# Altium PCB ETRX_FECU.PcbDoc
Units mm, origin at the board's own origin, x right, y up, seen from the top; angles counter-clockwise.
Board outline 150 x 55 mm, 4 copper layers (Top Layer, GND, PWR, Bottom Layer), stack 1.506 mm thick; 58 components, 50 nets, 256 pads, 177 vias.
Unrouted connection lines stored in the file: 6.
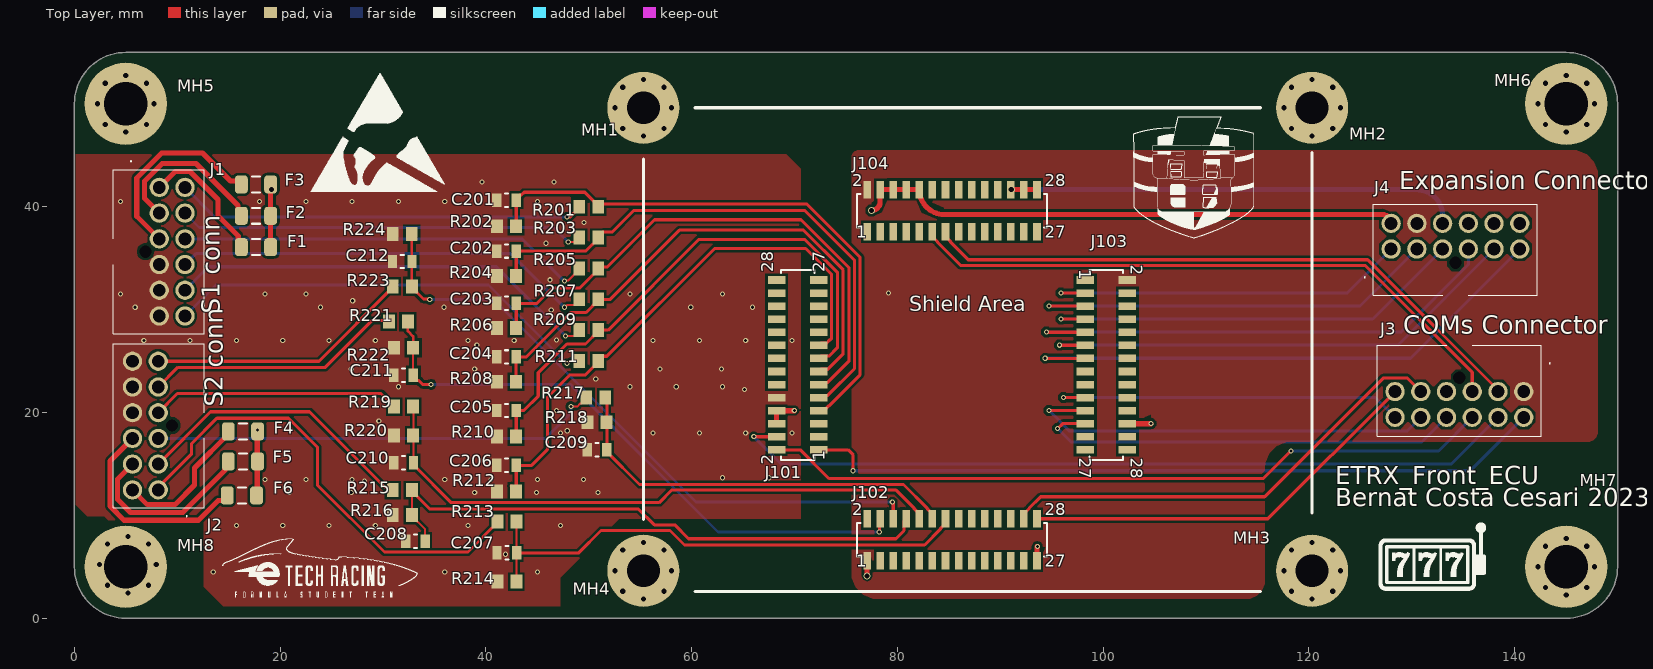
[diagram p0: Top Layer view]
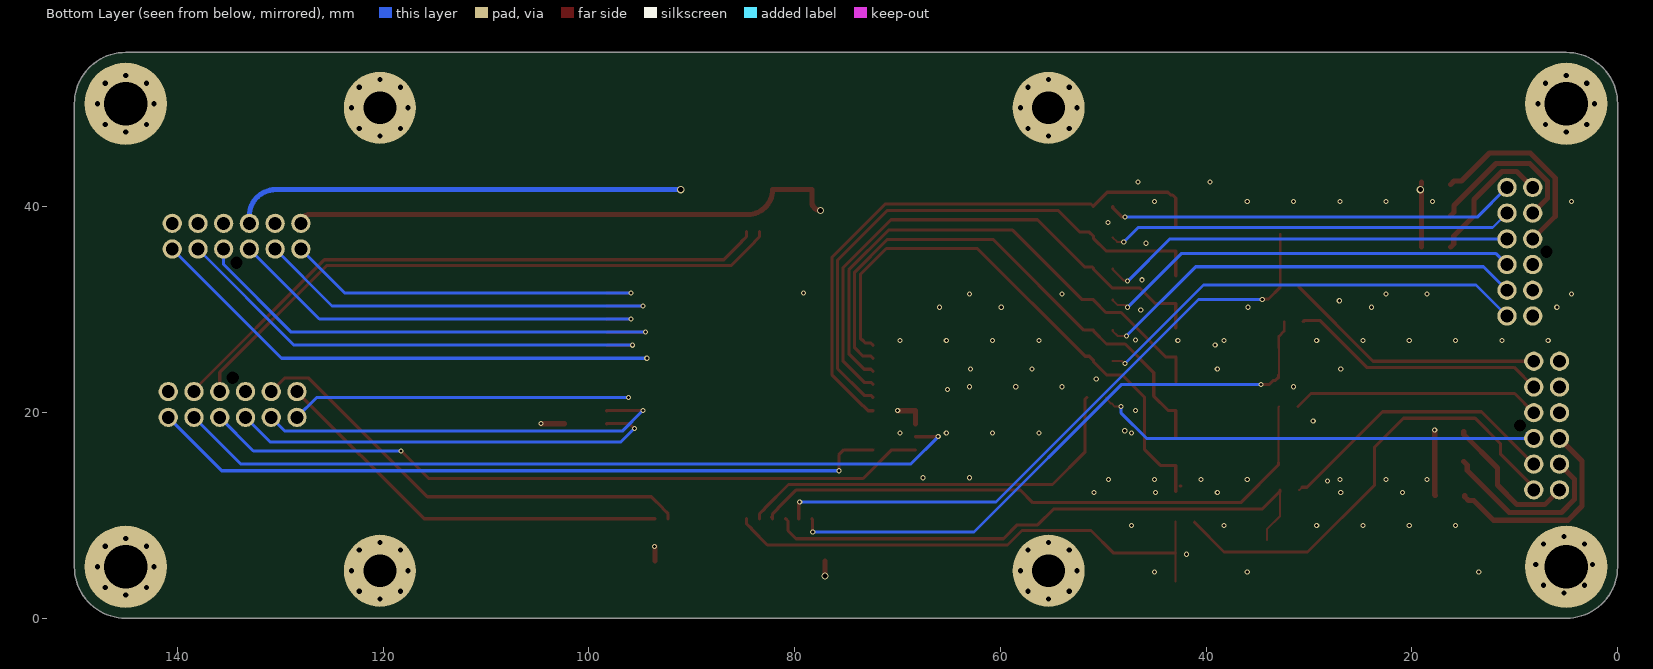
[diagram p1: Bottom Layer view, seen from below]
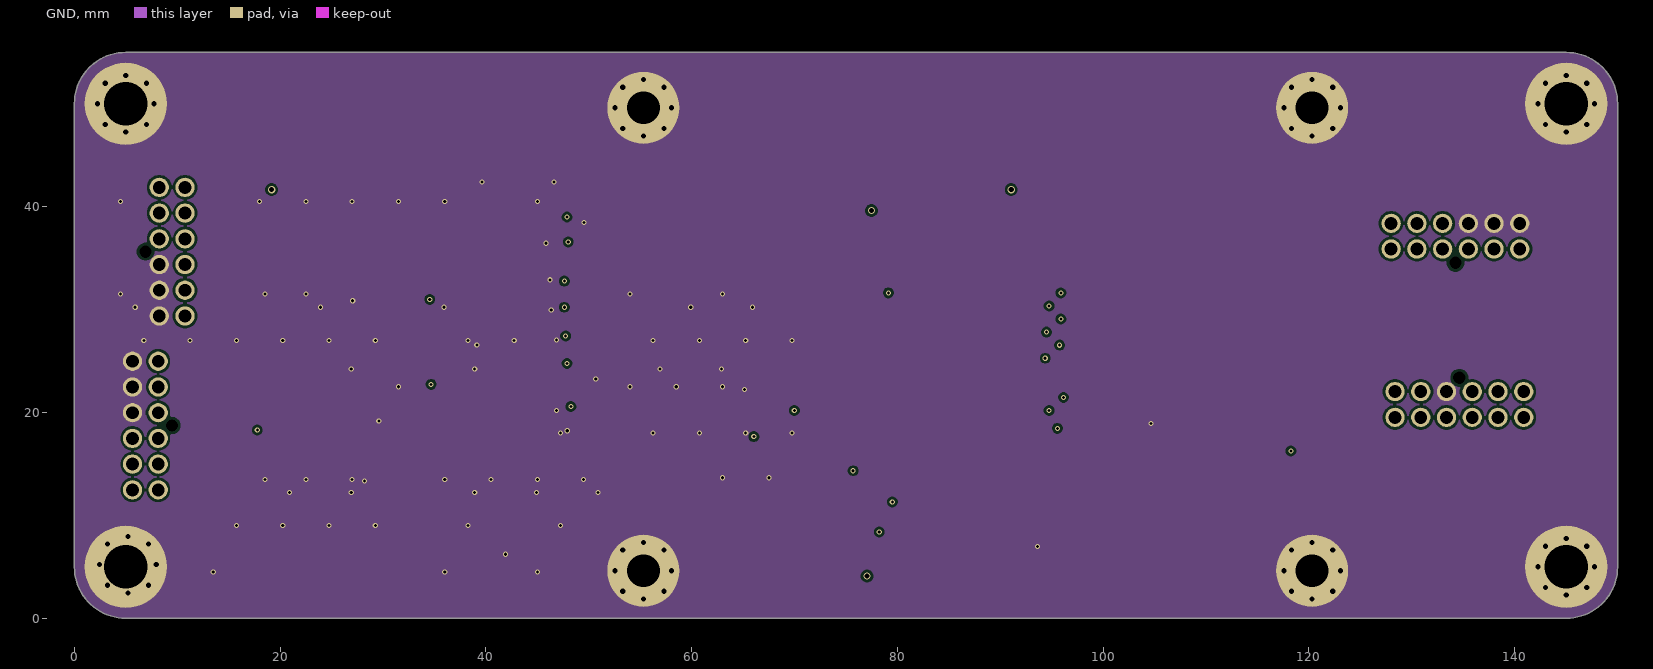
[diagram p2: GND]
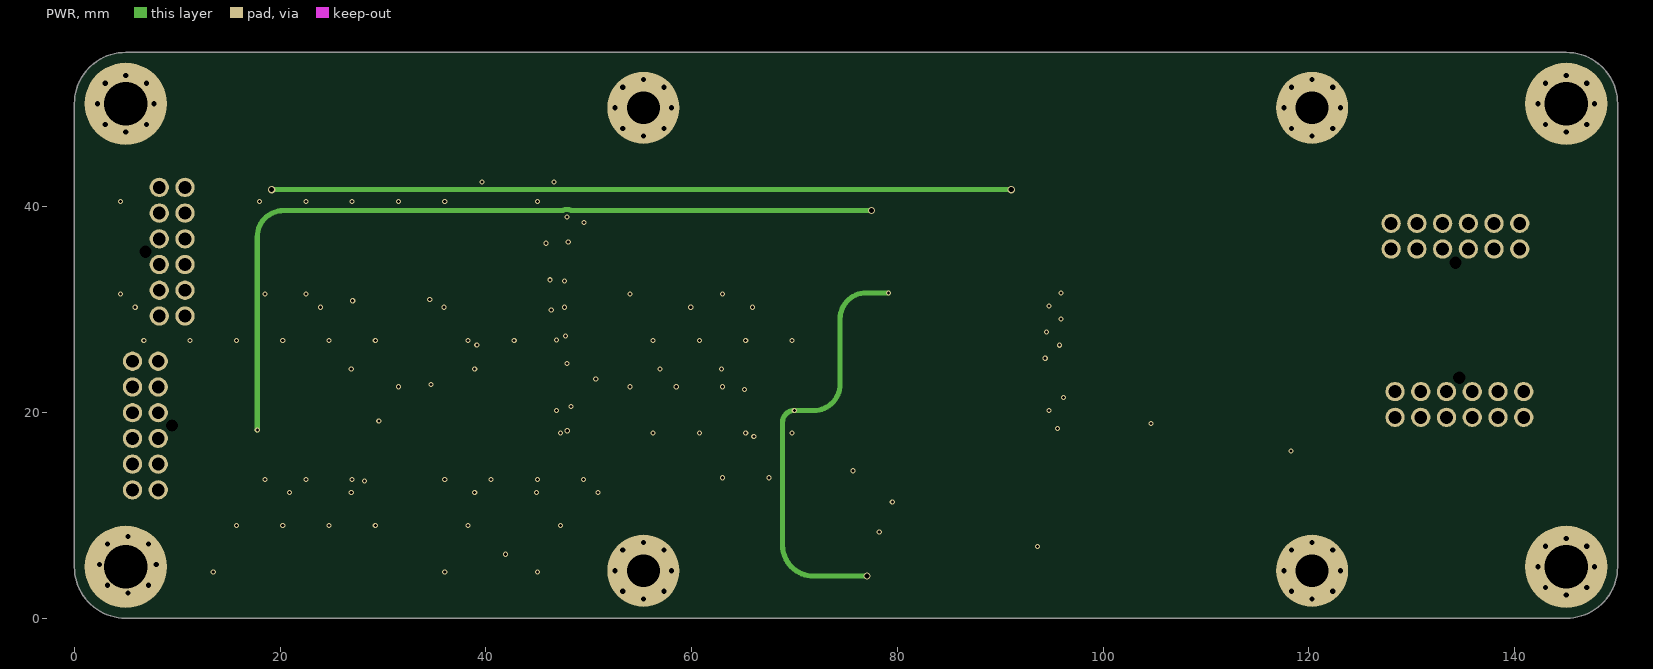
[diagram p3: PWR]
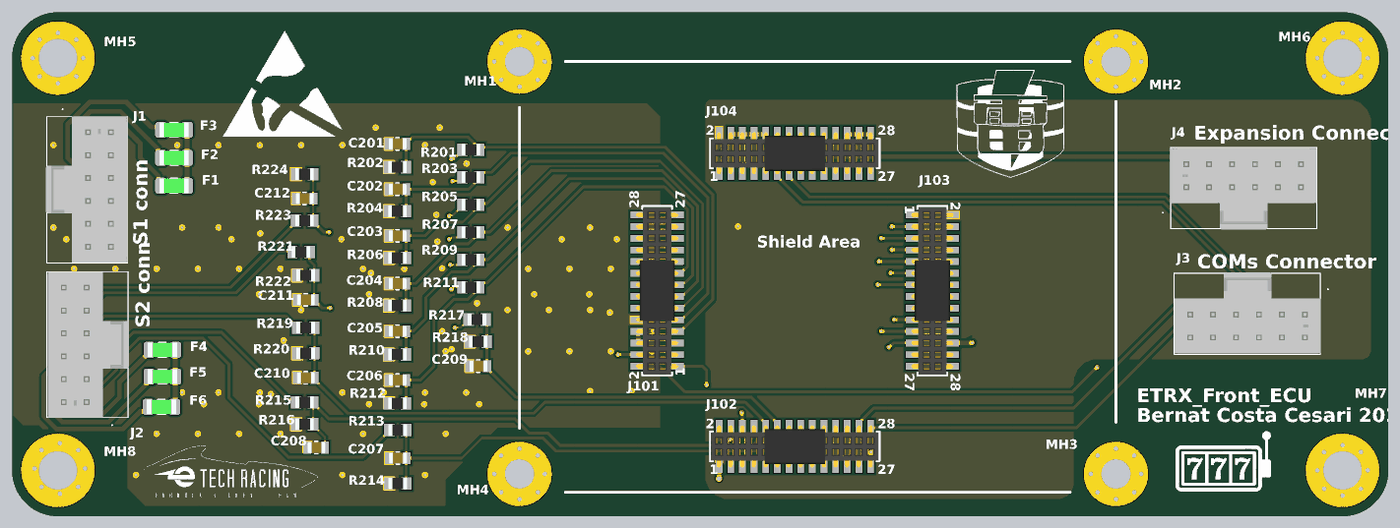
[diagram p4: 3D render of the assembled board from above, using the file's embedded part models]

## Layer stack, top to bottom
Top Solder: solder mask 0.01, Solder Resist, Dk 3.5
Top Layer: signal copper 0.035
Dielectric 2: prepreg 0.1, PP-006, Dk 4.1
GND: signal copper 0.018
Dielectric 4: prepreg 0.1, PP-006, Dk 4.1
Dielectric 1: dielectric 1, FR-4, Dk 4.8
Dielectric 5: prepreg 0.1, PP-006, Dk 4.1
PWR: signal copper 0.018
Dielectric 3: prepreg 0.1, PP-006, Dk 4.1
Bottom Layer: signal copper 0.035
Bottom Solder: solder mask 0.01, Solder Resist, Dk 3.5

## Board outline
0,5 0,50 cw(c5,50) 5,55 145,55 cw(c145,50) 150,50 150,5 cw(c145,5) 145,0 5,0 cw(c5,5)

## Design rules (kind name [scope] priority, off if disabled: settings)
Clearance [All] p1: gap=0.254 ignorepadtopadclearanceinfootprint=FALSE except(0: Arc-Hole Track-Hole SMDPad-Hole THPad-Hole Via-Hole Fill-Hole Poly-Hole Region-Hole Text-Hole)
HoleSize [All] p1: absolutevalues=TRUE maxlimit=2.54 minlimit=0.2 maxpercent=80.000 minpercent=20.000
HoleToHoleClearance [All] p1: gap=0.01 allowstackedmicrovias=TRUE
PlaneClearance [All] p1: clearance=0.5
PlaneConnect [All] p1: planeconnectstyle=Direct reliefexpansion=0.508 reliefentries=4 reliefconductorwidth=0.254 reliefairgap=0.254
PolygonConnect [All] p1: connectstyle=Direct reliefconductorwidth=0.254 reliefentries=4 polygonreliefangle="90 Angle" airgapwidth=0.254
RoutingVias [All] p1: holewidth=0.3 width=0.5 viastyle="Through Hole" minholewidth=0.3 minwidth=0.5 maxholewidth=0.711 maxwidth=1.27
SilkToSilkClearance [All] p1: silktosilkclearance=0
SilkToSolderMaskClearance [IsPad] p1: minsilkscreentomaskgap=0.1 clearancetoexposedcopper=TRUE
SolderMaskExpansion [All] p1: expansion=0.1 istentingtop=FALSE
Width [All] p1: maxlimit=2 minlimit=0.2 preferedwidth=0.254 toplayer_maxwidth=1 bottomlayer_maxwidth=1 minimp=50.000000 maximp=50.000000 favimp=50.000000
24 further rules are at their usual default settings.

## Classes and differential pairs
component class ETRX_FECU: F1 F2 F3 F4 F5 F6 J1 J2 J3 J4 MH1 MH2 MH3 MH4 MH5 MH6 MH7 MH8
component class "[2] Sensors": C201 C202 C203 C204 C205 C206 C207 C208 C209 C210 C211 C212 R201 R202 R203 R204 R205 R206 R207 R208 R209 R210 R211 R212 R213 R214 R215 R216 R217 R218 R219 R220 R221 R222 R223 R224
component class "[1] Shield": J101 J102 J103 J104

## Components (designator, comment, footprint, x,y, rotation, side; value= is the part's Value field where it differs from the comment)
C201 "885012207103" C0805FNPC-R 42,40.64 r180 top
C202 "885012207103" C0805FNPC-R 42,35.687 r180 top
C203 "885012207103" C0805FNPC-R 42,30.607 r180 top
C204 "885012207103" C0805FNPC-R 42,25.4 r180 top
C205 "885012207103" C0805FNPC-R 42,20.193 r180 top
C206 "885012207103" C0805FNPC-R 42,14.859 r180 top
C207 "885012207103" C0805FNPC-R 42.037,6.35 r180 top
C208 "885012207098" C0805FNPC-R 33.147,7.493 r180 top
C209 "885012207098" C0805FNPC-R 50.8,16.383 r180 top
C210 "885012207098" C0805FNPC-R 32.004,15.113 r180 top
C211 "885012207103" C0805FNPC-R 32,23.622 r180 top
C212 "885012207103" C0805FNPC-R 31.873,34.671 r180 top
F1 "0437001.WRA" Fuse_1206 17.653,36.068 r180 top
F2 "0437001.WRA" Fuse_1206 17.653,39.116 r180 top
F3 "0437001.WRA" Fuse_1206 17.653,42.164 r180 top
F4 "0437001.WRA" Fuse_1206 16.383,18.161 r0 top
F5 "0437001.WRA" Fuse_1206 16.383,15.24 r0 top
F6 "0437001.WRA" Fuse_1206 16.284,11.938 r0 top
J1 "1053101112" J_NanoFit_2x6_V 8.255,41.877 r90 top
J2 "1053101112" J_NanoFit_2x6_V 8.15,12.479 r270 top
J3 "1053101112" J_NanoFit_2x6_V 140.87,22.028 r0 top
J4 "1053101112" J_NanoFit_2x6_V 127.989,35.884 r180 top
J101 "62332821021" 62332821021 70.306,24.616 r90 top locked
J102 "62332821021" 62332821021 85.306,7.616 r0 top locked
J103 "62332821021" 62332821021 100.306,24.616 r270 top locked
J104 "62332821021" 62332821021 85.306,39.616 r0 top locked
MH1 "Mounting_Hole_M3" Mounting_Hole_M3 55.306,49.616 r0 top
MH2 "Mounting_Hole_M3" Mounting_Hole_M3 120.306,49.616 r0 top
MH3 "Mounting_Hole_M3" Mounting_Hole_M3 120.306,4.616 r0 top
MH4 "Mounting_Hole_M3" Mounting_Hole_M3 55.306,4.616 r0 top
MH5 "Mounting_Hole_M4" Mounting_Hole_M4#1 5,50 r0 top locked
MH6 "Mounting_Hole_M4" Mounting_Hole_M4#1 145,50 r0 top locked
MH7 "Mounting_Hole_M4" Mounting_Hole_M4#1 145,5 r0 top locked
MH8 "Mounting_Hole_M4" Mounting_Hole_M4#2 5.207,5.207 r0 top
R201 "CR0805-JW-102ELF" R0805FTK 50,40 r180 top
R202 "1k96" R0805FTK 42,38.1 r0 top
R203 "CR0805-JW-102ELF" R0805FTK 50,37 r180 top
R204 "1k96" R0805FTK 42,33.274 r0 top
R205 "CR0805-JW-102ELF" R0805FTK 50,34 r180 top
R206 "1k96" R0805FTK 42,28.194 r0 top
R207 "CR0805-JW-102ELF" R0805FTK 50,31 r180 top
R208 "1k96" R0805FTK 42,22.987 r0 top
R209 "CR0805-JW-102ELF" R0805FTK 50,28 r180 top
R210 "1k96" R0805FTK 42,17.653 r0 top
R211 "CR0805-JW-102ELF" R0805FTK 50,25 r180 top
R212 "1k96" R0805FTK 42,12.319 r0 top
R213 "CR0805-JW-102ELF" R0805FTK 42.037,9.398 r180 top
R214 "1k96" R0805FTK 42.037,3.556 r0 top
R215 "12k5" R0805FTK 31.877,12.446 r0 top
R216 "2k" R0805FTK 31.877,10.033 r180 top
R217 "12k5" R0805FTK 50.673,21.463 r0 top
R218 "2k" R0805FTK 50.8,19.05 r180 top
R219 "12k5" R0805FTK 32,20.574 r0 top
R220 "2k" R0805FTK 32.004,17.78 r180 top
R221 "CR0805-JW-102ELF" R0805FTK 31.496,28.829 r180 top
R222 "1k96" R0805FTK 32,26.289 r0 top
R223 "CR0805-JW-102ELF" R0805FTK 31.877,32.258 r180 top
R224 "1k96" R0805FTK 31.873,37.338 r0 top

## Footprints (in the part's own frame and the unit in brackets; to place one, negate y for a bottom-side part, rotate by r counter-clockwise, add the part's x,y. Pads: shape width x height; smd on the part's side, far side on the other; paste and mask are expansions set on the pad)
62332821021 [mm] "Socket Header, Pitch 1.27 mm, SMT, Vertical, dual row, 28p"
  rect 0.74x1.7 smd: 1(-8.255,-2.05) 2(-8.255,2.05) 3(-6.985,-2.05) 4(-6.985,2.05) 5(-5.715,-2.05) 6(-5.715,2.05) 7(-4.445,-2.05) 8(-4.445,2.05) 9(-3.175,-2.05) 10(-3.175,2.05) 11(-1.905,-2.05) 12(-1.905,2.05) 13(-0.635,-2.05) 14(-0.635,2.05) 15(0.635,-2.05) 16(0.635,2.05) 17(1.905,-2.05) 18(1.905,2.05) 19(3.175,-2.05) 20(3.175,2.05) 21(4.445,-2.05) 22(4.445,2.05) 23(5.715,-2.05) 24(5.715,2.05) 25(6.985,-2.05) 26(6.985,2.05) 27(8.255,-2.05) 28(8.255,2.05)
  silkscreen extent -9.24,-1.62 9.24,1.63, body extent -9.09,-2.3 9.09,2.3, height 4.69
C0805FNPC-R [mm]
  rect 0.9x1.3 smd: 1(-0.95,0) 2(0.95,0)
  silkscreen extent -0.15,-0.65 0.15,0.65, body extent -1.03,-0.63 0.97,0.63, height 0.96
Fuse_1206 [mm] "Chip Resistor, 2-Leads, Body 3,20x1,58mm, IPC Medium Density"
  rrect50% 1.25x1.75 smd: 1(-1.425,0) 2(1.425,0)
  silkscreen extent -0.4,-0.77 0.4,0.77, body extent -1.6,-0.79 1.6,0.79, height 0.86
J_NanoFit_2x6_V [mm]
  round 1.875 hole 1.25: 1(0,0) 2(-2.5,0) 3(-5,0) 4(-7.5,0) 5(-10,0) 6(-12.5,0) 7(0,-2.5) 8(-2.5,-2.5) 9(-5,-2.5) 10(-7.5,-2.5) 11(-10,-2.5) 12(-12.5,-2.5)
  round 0.675 hole 1.2 unplated: MH1(-6.25,1.34)
  silkscreen extent -14.22,-4.35 2.6,4.49, body extent -14.19,-4.26 1.75,4.58, height 10.68
Mounting_Hole_M3 [mm]
  round 7 hole 3.2: 1(0,0)
Mounting_Hole_M4#1 [mm]
  round 8 hole 4.2: 1(0,0)
Mounting_Hole_M4#2 [mm]
  round 8 hole 4.2: 1(-0.207,-0.207)
R0805FTK [mm] "Chip Resistor, 2-Leads, Body 2,00x1,25mm, IPC Medium Density"
  rect 1.15x1.35 smd: 1(-0.925,0) 2(0.925,0)
  body extent -1,-0.63 1,0.63, height 0.65

## Part data
C201 C202 C203 C204 C205 C206 C207 C211 C212: library part C1u-50V-0805FNPC-X7R, "Multilayer Ceramic Capacitor, Wcap-Csgp Series, 1 F, 10%, X7R, 50 V, 0805 [2012 Metric] Rohs Compliant: Yes", Capacitance=1uF, Case Code (Imperial)=0805, Case Code (Metric)=2012, Dielectric=X7R, Manufacturer 1="Wurth Electronics", Max Operating Temperature=85°C, Min Operating Temperature=-55°C, Supplier Part Number 1=1813523, Tolerance=10%, Voltage Rating=50V, .Creator=GP, Case/Package=0805, Category="Ceramic Capacitors", ComponentLink1Description=http://www.farnell.com/datasheets/1958501.pdf?src-supplier=Farnell, ComponentLink1URL=http://www.farnell.com/datasheets/1958501.pdf?src-supplier=Farnell, ComponentLink2Description=http://www.farnell.com/datasheets/1958501.pdf?src-supplier=Element14, ComponentLink2URL=http://www.farnell.com/datasheets/1958501.pdf?src-supplier=Element14, ComponentLink3Description=https://katalog.we-online.de/pbs/datasheet/885012107003.pdf?src-supplier=Digi-Key, ComponentLink3URL=https://katalog.we-online.de/pbs/datasheet/885012107003.pdf?src-supplier=Digi-Key, ComponentLink4Description=http://www.farnell.com/datasheets/1958501.pdf?src-supplier=Newark, ComponentLink4URL=http://www.farnell.com/datasheets/1958501.pdf?src-supplier=Newark, Length=0.079inch, Manufacturer Part Number 1=885012207103, Mount="Surface Mount", Packaging="Cut Tape", Pricing 1="50=0,27200, 250=0,25300, 500=0,22800, 1250=0,20100, 2500=0,17100 (GBP)", REACH SVHC=Unknown, RoHS=Yes, RoHS Compliant=Yes, Stock 1=5100, Supplier 1=RSComponents, Thickness=0.053inch, Voltage Rating (DC)=50V, Width=0.049inch
C208 C209 C210: library part C100n-50V-0805FNPC-X7R, "Cap, 0.1ΜF, 50V, 10%, X7R, 0805", Capacitance=100nF, Case Code (Imperial)=0805, Case Code (Metric)=2012, Dielectric=X7R, Manufacturer 1="Wurth Electronics", Max Operating Temperature=125°C, Min Operating Temperature=-55°C, Supplier Part Number 1=1813493, Tolerance=10%, Voltage Rating=50V, .Creator=DR, Case/Package=0805, Category="Ceramic Capacitors", ComponentLink1Description=http://www.farnell.com/datasheets/1958498.pdf?src-supplier=Farnell, ComponentLink1URL=http://www.farnell.com/datasheets/1958498.pdf?src-supplier=Farnell, ComponentLink2Description=http://www.farnell.com/datasheets/1958498.pdf?src-supplier=Element14, ComponentLink2URL=http://www.farnell.com/datasheets/1958498.pdf?src-supplier=Element14, ComponentLink3Description=https://katalog.we-online.de/pbs/datasheet/885012207098.pdf?src-supplier=Digi-Key, ComponentLink3URL=https://katalog.we-online.de/pbs/datasheet/885012207098.pdf?src-supplier=Digi-Key, ComponentLink4Description=http://www.farnell.com/datasheets/1958498.pdf?src-supplier=Newark, ComponentLink4URL=http://www.farnell.com/datasheets/1958498.pdf?src-supplier=Newark, Length=0.079inch, Manufacturer Part Number 1=885012207098, Mount="Surface Mount", Packaging="Cut Tape", Pricing 1="100=0,10200, 500=0,07100, 2000=0,06100 (GBP)", REACH SVHC=Unknown, RoHS=Yes, RoHS Compliant=Yes, Stock 1=8000, Supplier 1=RSComponents, Thickness=0.035inch, Voltage Rating (DC)=50V, Width=0.049inch
F1 F2 F3 F4 F5 F6: library part Fuse_1A_63V_1206, "Fuse Chip Fast Acting 1A 63V SMD Solder Pad 1206 Ceramic T/R Automotive", Case Code (Imperial)=1206, Case Code (Metric)=3216, Current Rating=1A, Manufacturer=Littelfuse, Max Operating Temperature=150°C, Min Operating Temperature=-55°C, Supplier Part Number 1=F10001CT-ND, Voltage Rating (AC)=63V, .Creator=DO, Approvals=CSA,cURus, Case/Package=1206, Category=Fuses, ComponentLink1Description=https://www.littelfuse.com/~/media/electronics/datasheets/fuses/littelfuse_fuse_437a_datasheet.pdf.pdf?src-supplier=Digi-Key, ComponentLink1URL=https://www.littelfuse.com/~/media/electronics/datasheets/fuses/littelfuse_fuse_437a_datasheet.pdf.pdf?src-supplier=Digi-Key, ComponentLink2Description="Where buy it", ComponentLink2URL=https://www.mouser.es/ProductDetail/Littelfuse/0437001WRA?qs=DXv0QSHKF4z9CJhPXjxR%252BA%3D%3D, Fuse Type="Board Mount (Cartridge Style Excluded)", Manufacturer Part Number=0437001.WRA, Mount="Surface Mount", Packaging="Tape and Reel", Pricing 1="1=1,52000, 5=1,47000, 10=1,37600, 50=1,13860, 100=0,94880, 250=0,92508, 500=0,78276, 1000=0,68788 (USD)", RoHS=Yes, Stock 1=5820, Supplier 1=Digi-Key, Voltage Rating (DC)=63V
J1 J2 J3 J4: library part J_NanoFit_2x6_V, "Nano-Fit Vertical Header, Through Hole, 2.50mm Pitch, Dual Row, 12 Circuits, with Kinked Pins, Tin (Sn) Plating, Black, Glow-Wire Capable, Tray"
J101 J102 J103 J104: "WR-PHD Socket Header, SMT, Vertical, pitch 1.27mm, 2 Row, 28P", Contact Resistance=20mΩ, Manufacturer="Wurth Elektronik", Operating Temperature Max=105°C, Operating Temperature Min=-40°C, Rated Current=1A, Withstanding Voltage=500V, Working Voltage=250V, Category="Board-to-Board Connectors", ComponentLink1Description="Website Link", ComponentLink1URL=https://www.we-online.com/redexpert/article/62332821021?ad, ComponentLink2Description="Datasheet Link", ComponentLink2URL=https://www.we-online.com/redexpert/spec/62332821021?ad, Gender="Socket Header", Manufacturer Part Number=62332821021, Match Code=WR-PHD, Mount="Surface Mount", Number of Pins=28, Number of Rows=2, Orientation=Vertical, Packaging="Tape and Reel", Pitch=1.27mm
R201 R203 R205 R207 R209 R211 R213 R221 R223: library part R1k-0805FTK, "Res Thick Film 0805 1K Ohm 5% 1/8W ±200ppm/°C Molded SMD SMD Paper Tape on Plastic Reel", Case Code (Imperial)=0805, Case Code (Metric)=2012, Manufacturer 1=Bourns, Max Operating Temperature=155°C, Max Power Dissipation=125mW, Min Operating Temperature=-55°C, Package Quantity=1, Resistance=1kR, Resistor Type="Thick Film", Temperature Coefficient=200ppm/°C, Tolerance=5%, Voltage Rating=150V, .Creator=GP, Case/Package=0805, Category="Chip SMD Resistors", ComponentLink1Description=https://datasheet.ciiva.com/11821/0900766b80fcdb72-11821134.pdf?src-supplier=RSComponents, ComponentLink1URL=https://datasheet.ciiva.com/11821/0900766b80fcdb72-11821134.pdf?src-supplier=RSComponents, ComponentLink2Description=https://datasheet.ciiva.com/15225/getdatasheetpartid-78155-15225381.pdf?src-supplier=Verical, ComponentLink2URL=https://datasheet.ciiva.com/15225/getdatasheetpartid-78155-15225381.pdf?src-supplier=Verical, ComponentLink3Description=https://datasheet.ciiva.com/22693/1902866-22693253.pdf?src-supplier=Element14, ComponentLink3URL=https://datasheet.ciiva.com/22693/1902866-22693253.pdf?src-supplier=Element14, ComponentLink4Description=https://datasheet.ciiva.com/7986/1856384-7986184.pdf?src-supplier=Element14, ComponentLink4URL=https://datasheet.ciiva.com/7986/1856384-7986184.pdf?src-supplier=Element14, ComponentLink5Description=https://datasheet.ciiva.com/7985/1856384-7985867.pdf?src-supplier=Element14, ComponentLink5URL=https://datasheet.ciiva.com/7985/1856384-7985867.pdf?src-supplier=Element14, ComponentLink6Description=https://datasheet.ciiva.com/30242/159chpreztr-30242765.pdf?src-supplier=Onlinecomponents.com, ComponentLink6URL=https://datasheet.ciiva.com/30242/159chpreztr-30242765.pdf?src-supplier=Onlinecomponents.com, ComponentLink7Description=https://datasheet.ciiva.com/6547/chpreztr-6547359.pdf?src-supplier=Digi-Key, ComponentLink7URL=https://datasheet.ciiva.com/6547/chpreztr-6547359.pdf?src-supplier=Digi-Key, Contact Plating=Tin, Depth=1.25mm, Features="Moisture Resistant", Height=0.5mm, Lead Free="Lead Free", Length=2mm, Manufacturer Part Number 1=CR0805-JW-102ELF, Military Standard=Not, Mount="Surface Mount", Number of Pins=2, Number of Terminations=2, Packaging="Tape and Reel", Power Rating=125mW, Pricing 1="1=0,05930, 10=0,03510, 25=0,01790, 100=0,00800, 250=0,00790, 500=0,00590, 1000=0,00360, 3000=0,00350, 6000=0,00250 (USD)", Radiation Hardening=No, REACH SVHC="No SVHC", RoHS=Yes, Stock 1=27510, Supplier 1="Arrow Electronics", Supplier Part Number 1=CR0805-JW-102ELF, Termination=SMD/SMT, Thickness=508um, Voltage Rating (DC)=150V, Width=1.25mm
R202 R204 R206 R208 R210 R212 R214 R222 R224: library part R1k96-0805FTK
R215 R217 R219: library part R12k5-0805FTK
R216 R218 R220: library part R2k-0805FTK

## Via types
v1: diameter 0.5, hole 0.3, Top Layer to Bottom Layer, 109 vias
v2: diameter 0.7, hole 0.5, Top Layer to Bottom Layer, 68 vias

## Nets (pads, with @x,y where several pads share a name; then routed paths per layer and width w, separated by ;. In a path a pad name is that pad's centre, name@x,y a point inside that pad or via, vN(x,y) a via of type N, cw(c..) or ccw(c..) an arc to the next point about the centre after c; other vN are vias at no path point)
+5: F1.1 F2.1 F3.1 J4.9 J104.24 J104.26 J104.28 | length 124.4
  Top Layer w0.5: F1.1 F2.1 19.078,41.557 cw(c19.177,41.557) v2(19.177,41.656) ; F3.1 F3.1@19.078,42.38 ; v2(91.059,41.656) 91.059,41.666 J104.26 J104.28
  PWR w0.5: v2(19.177,41.656) v2(91.059,41.656)
  Bottom Layer w0.5: v2(91.059,41.656) 130.449,41.656 cw(c130.449,39.116) 132.989,39.116 J4.9
AGND: C201.2 C202.2 C203.2 C204.2 C205.2 C206.2 C207.2 C208.2 C209.2 C210.2 C211.2 C212.2 J1.4 J1.5 J1.6 J2.10 J2.11 J2.12 J3.4 J4.10 J4.11 J4.12 J101.10 J102.27 J103.24 MH1.1 MH2.1 MH3.1 MH4.1 MH5.1 MH6.1 MH7.1 MH8.1 R202.1 R204.1 R206.1 R208.1 R210.1 R212.1 R214.1 R216.2 R218.2 R220.2 R222.1 R224.1 | length 4.2
  Top Layer w0.5: J102.27 93.561,6.947 cw(c93.599,6.947) v1(93.599,6.985) ; J103.24 104.626,18.901 ccw(c104.626,18.923) v1(104.648,18.923)
  GND w0.5: J2.10@5.356,19.685 ccw(c5.356,19.979) J2.10
  other v1: 13.5,4.5 36,4.5 45,4.5 41.91,6.223 15.75,9 20.25,9 24.75,9 29.25,9 38.25,9 47.25,9 20.91,12.223 26.91,12.223 38.91,12.223 44.91,12.223 50.91,12.223 28.194,13.335 18.534,13.5 22.5,13.5 27,13.5 36,13.5 40.5,13.5 45,13.5 49.5,13.5 63,13.654 67.5,13.654 47.25,18 56.25,18 60.75,18 65.25,18 69.75,18 47.91,18.223 29.591,19.177 46.863,20.193 65.151,22.225 31.5,22.5 54,22.5 58.5,22.5 63,22.5 50.673,23.241 26.91,24.223 38.91,24.223 56.91,24.223 62.91,24.223 39.116,26.543 6.75,27 11.25,27 15.75,27 20.25,27 24.75,27 29.25,27 38.25,27 42.75,27 56.25,27 60.75,27 65.25,27 69.75,27 46.863,27.051 46.355,29.972 5.91,30.223 23.91,30.223 35.91,30.223 59.91,30.223 65.91,30.223 27.051,30.861 4.5,31.5 18.534,31.5 22.5,31.5 54,31.5 63,31.5 46.228,32.893 45.847,36.449 49.53,38.481 4.5,40.5 18,40.5 22.5,40.5 27,40.5 31.5,40.5 36,40.5 45,40.5 39.624,42.41 46.609,42.41
  other v2: 55.306,1.866 120.306,1.866 145,2.25 5.207,2.457 53.306,2.616 57.306,2.616 118.306,2.616 122.306,2.616 143,3 147,3 3.207,3.207 7.207,3.207 52.556,4.616 58.056,4.616 117.556,4.616 123.056,4.616 142.25,5 147.75,5 2.457,5.207 7.957,5.207 53.306,6.616 57.306,6.616 118.306,6.616 122.306,6.616 143,7 147,7 3.207,7.207 7.207,7.207 55.306,7.366 120.306,7.366 145,7.75 5.207,7.957 55.306,46.866 120.306,46.866 5,47.25 145,47.25 53.306,47.616 57.306,47.616 118.306,47.616 122.306,47.616 3,48 7,48 143,48 147,48 52.556,49.616 58.056,49.616 117.556,49.616 123.056,49.616 2.25,50 7.75,50 142.25,50 147.75,50 53.306,51.616 57.306,51.616 118.306,51.616 122.306,51.616 3,52 7,52 143,52 147,52 55.306,52.366 120.306,52.366 5,52.75 145,52.75
I2C1_SDA: J3.3 J104.11 | length 60.3
  Top Layer w0.3: J104.11 83.401,37.086 83.897,36.59 83.897,36.549 86.156,34.29 125.476,34.29 135.87,23.896 J3.3
I2C2_SCL: J3.5 J102.26 | length 45.1
  Top Layer w0.3: J102.26 92.291,10.146 92.787,10.642 92.787,10.683 93.915,11.811 115.697,11.811 127.256,23.37 129.528,23.37 J3.5
I2C2_SDA: J3.6 J102.28 | length 39.9
  Top Layer w0.3: J102.28 116.008,9.666 J3.6
ISC1_SCL: J3.2 J104.13 | length 60.5
  Top Layer w0.3: J104.13 84.671,37.086 85.167,36.59 85.167,36.549 86.872,34.844 125.705,34.844 126.35,34.199 138.37,22.179 J3.2
"LV tr": F4.2 F5.2 F6.2 J4.7 J104.4 J104.6 J104.8 J104.10 | length 140.4
  Top Layer w0.5: F6.2 ccw(c17.709,12.009) 17.78,12.009 v1(17.78,18.288) ; v2(77.47,39.624) ccw(c77.47,40.475) 78.321,40.475 J104.4 J104.6 J104.8 J104.10 ccw(c84.554,41.666) 84.554,39.243 127.13,39.243 cw(c127.13,38.384) J4.7
  PWR w0.5: v1(17.78,18.288) 17.78,37.084 cw(c20.32,37.084) 20.32,39.624 47.472,39.624 cw(c47.879,38.989) 48.286,39.624 v2(77.47,39.624)
NetF1_2: F1.2 J1.1 | length 13.1
  Top Layer w0.5: J1.1 9.812,43.434 11.237,43.434 13.97,40.701 13.97,39.116 15.934,37.152 15.934,36.362 F1.2
NetF2_2: F2.2 J1.2 | length 16.3
  Top Layer w0.5: J1.2 6.813,40.819 6.813,42.474 8.535,44.196 11.811,44.196 15.892,40.115 15.892,39.452 F2.2
NetF3_2: F3.2 J1.3 | length 19.3
  Top Layer w0.5: J1.3 6.06,39.072 6.06,42.786 8.485,45.212 12.446,45.212 15.172,42.486 15.906,42.486 F3.2
NetF4_1: F4.1 J2.7 | length 14
  Top Layer w0.5: J2.7 7.091,11.037 9.767,11.037 11.684,12.954 11.684,14.605 14.958,17.879 F4.1
NetF5_1: F5.1 J2.8 | length 17.7
  Top Layer w0.5: J2.8 4.208,13.537 4.208,11.54 5.465,10.283 10.537,10.283 14.622,14.368 14.622,14.904 F5.1
NetF6_1: F6.1 J2.9 | length 20.5
  Top Layer w0.5: J2.9 3.454,15.284 3.454,10.897 4.822,9.53 12.07,9.53 13.98,11.44 14.489,11.44 14.859,11.81 F6.1
PA0: C203.1 J101.11 R205.1 R206.2 | length 53.1
  Top Layer w0.3: R206.2 42.95,28.219 C203.1 44.958,30.607 46.43,32.079 49.104,32.079 50.925,33.9 R205.1 51.046,34.121 51.774,34.121 56.388,38.735 70.634,38.735 75.272,34.097 75.272,24.98 73.223,22.931 72.576,22.931 J101.11
PA1: C202.1 J101.9 R203.1 R204.2 | length 54.2
  Top Layer w0.3: R204.2 42.95,33.299 C202.1 49.712,35.687 50.925,36.9 R203.1 50.925,37.1 51.35,37.525 52.257,37.525 54.356,39.624 70.993,39.624 75.826,34.791 75.826,24.264 73.223,21.661 72.576,21.661 J101.9
PA2: C201.1 J101.7 R201.1 R202.2 | length 56.2
  Top Layer w0.3: R202.2 42.95,38.125 C201.1 42.95,40.84 43.25,41.14 43.45,41.14 43.712,41.402 49.623,41.402 50.925,40.1 R201.1 51.184,40.259 71.186,40.259 76.38,35.065 76.38,23.674 73.373,20.667 73.332,20.667 72.836,20.171 J101.7 J101.7@72.365,20.181
PA5: J3.7 J101.1 | length 72.4
  Top Layer w0.3: J101.1 72.365,16.371 75.204,16.371 75.692,15.883 v1(75.692,14.332)
  Bottom Layer w0.3: v1(75.692,14.332) 75.695,14.335 135.677,14.335 J3.7
PA6: J3.8 J101.4 | length 77.5
  Top Layer w0.3: v1(66.04,17.65) 66.049,17.641 68.246,17.641 J101.4
  Bottom Layer w0.3: v1(66.04,17.65) 68.704,14.986 133.828,14.986 J3.8
PA7: J3.9 J101.2 | length 71.2
  Top Layer w0.3: J101.2 70.565,16.361 73.337,13.589 115.57,13.589 v1(118.237,16.256)
  Bottom Layer w0.3: v1(118.237,16.256) 132.598,16.256 J3.9
PA8: J4.1 J103.3 | length 36.2
  Top Layer w0.3: v1(95.885,31.62) 95.894,31.611 98.247,31.611 J103.3
  Bottom Layer w0.3: v1(95.885,31.62) 123.725,31.62 J4.1
PB1: C211.1 J102.4 R221.1 R222.2 | length 58.5
  Top Layer w0.2: R222.2 32.925,23.647 C211.1
  Top Layer w0.254: R221.1 32.421,27.904 32.925,27.4 R222.2
  Top Layer w0.3: C211.1 32.95,23.422 33.25,23.122 33.45,23.122 33.839,22.733 v1(34.671,22.733) ; v1(78.232,8.382) 78.27,8.42 78.27,9.615 J102.4
  Bottom Layer w0.3: v1(34.671,22.733) 48.203,22.733 62.554,8.382 v1(78.232,8.382)
PB2: C212.1 J102.6 R223.1 R224.2 | length 62.2
  Top Layer w0.254: R223.1@32.798,32.262 R224.2
  Top Layer w0.3: R223.1@32.798,32.262 32.798,32.162 33.93,31.03 33.93,31.026 34.506,31.026 v1(34.544,30.988) ; v1(79.502,11.303) 79.502,11.249 79.591,11.16 J102.6
  Bottom Layer w0.3: v1(34.544,30.988) 40.731,30.988 60.416,11.303 v1(79.502,11.303)
PC1: C206.1 J101.17 R211.1 R212.2 | length 53.9
  Top Layer w0.3: R212.2@42.436,12.844 R212.2@42.536,12.844 ; R212.2 42.95,12.344 C206.1 44.45,14.859 45.974,16.383 45.974,21.463 48.17,23.659 49.684,23.659 50.925,24.9 R211.1 R211.1@50.925,25.036 ; R211.1@50.925,25.1 R211.1@50.925,25.036 ; J101.17 72.576,26.741 73.097,26.741 73.373,27.017 73.416,27.017 73.61,27.211 73.61,33.408 71.077,35.941 62.23,35.941 51.75,25.461 51.35,25.461 R211.1@50.925,25.036
PC2: C205.1 J101.15 R209.1 R210.2 | length 53
  Top Layer w0.3: R210.2 42.95,17.678 C205.1 43.688,20.193 45.085,21.59 45.085,23.876 47.868,26.659 49.684,26.659 50.925,27.9 R209.1 51.876,28 60.706,36.83 70.972,36.83 74.164,33.638 74.164,26.285 73.35,25.471 72.576,25.471 J101.15
PC3: C204.1 J101.13 R207.1 R208.2 | length 52.2
  Top Layer w0.3: R208.2 42.925,25.375 C204.1 43.942,25.4 48.26,29.718 49.743,29.718 50.925,30.9 R207.1 52.082,31 58.801,37.719 70.866,37.719 74.718,33.867 74.718,25.696 73.223,24.201 72.576,24.201 J101.13
PC6: J4.5 J103.11 | length 48.6
  Top Layer w0.3: v1(95.758,26.54) 95.767,26.531 98.247,26.531 J103.11
  Bottom Layer w0.3: v1(95.758,26.54) 128.645,26.54 J4.5
PC7: J4.4 J103.9 | length 49
  Top Layer w0.3: v1(94.488,27.81) 94.497,27.801 98.247,27.801 J103.9
  Bottom Layer w0.3: v1(94.488,27.81) 128.925,27.81 135.489,34.374 J4.4
PC8: J4.3 J103.7 | length 42.3
  Top Layer w0.3: v1(95.885,29.08) 95.894,29.071 98.247,29.071 J103.7
  Bottom Layer w0.3: v1(95.885,29.08) 126.185,29.08 J4.3
PC9: J4.2 J103.5 | length 41.6
  Top Layer w0.3: v1(94.742,30.35) 94.751,30.341 98.247,30.341 J103.5
  Bottom Layer w0.3: v1(94.742,30.35) 124.955,30.35 J4.2
PD8: J3.10 J103.23 | length 42.2
  Top Layer w0.3: v1(95.55,18.458) 95.604,18.458 96.057,18.911 98.247,18.911 J103.23
  Bottom Layer w0.3: v1(95.55,18.458) 96.862,17.145 130.987,17.145 J3.10
PD9: J3.11 J103.21 | length 41
  Top Layer w0.3: v1(94.742,20.19) 94.751,20.181 98.247,20.181 J103.21
  Bottom Layer w0.3: v1(94.742,20.19) 96.746,18.186 129.528,18.186 J3.11
PD10: J3.12 J103.19 | length 35.2
  Top Layer w0.3: v1(96.139,21.46) 96.148,21.451 98.247,21.451 J103.19
  Bottom Layer w0.3: v1(96.139,21.46) 126.438,21.46 J3.12
PD15: J4.6 J103.13 | length 54.4
  Top Layer w0.3: v1(94.361,25.27) 94.37,25.261 98.247,25.261 J103.13
  Bottom Layer w0.3: v1(94.361,25.27) 129.875,25.27 J4.6
PE7: C208.1 J102.8 R215.2 R216.1 | length 56.6
  Top Layer w0.2: R215.2@32.879,12.269 32.802,12.192 R216.1 32.802,9.933 34.097,8.638 C208.1@34.097,7.62
  Top Layer w0.3: R215.2 32.802,12.346 32.879,12.269 34.526,10.622 54.821,10.622 56.369,9.074 58.352,9.074 59.698,7.728 79.864,7.728 80.645,8.509 80.645,9.45 J102.8
PE8: C210.1 J102.10 R219.2 R220.1 | length 58.6
  Top Layer w0.2: R219.2 32.954,20.545 C210.1 ; J102.10 J102.10@82.296,9.831
  Top Layer w0.3: C210.1 32.954,14.913 36.627,11.24 56.833,11.24 58.039,12.446 79.872,12.446 81.635,10.683 81.635,10.642 82.131,10.146 J102.10
PE9: C209.1 J102.12 R217.2 R218.1 | length 40
  Top Layer w0.3: R217.2 51.75,21.311 51.75,19.05 C209.1 51.75,16.183 54.933,13 80.588,13 82.905,10.683 82.905,10.642 83.401,10.146 J102.12
PE10: C207.1 J102.14 R213.1 R214.2 | length 50.4
  Top Layer w0.2: R214.2 R213.1
  Top Layer w0.3: C207.1 49.02,6.35 51.19,8.52 57.901,8.52 59.309,7.112 82.638,7.112 84.175,8.649 84.175,8.69 84.671,9.186 J102.14
S1: J1.7 R201.2 | length 40
  Top Layer w0.3: v1(47.879,38.989) 48.164,38.989 49.075,39.9 R201.2
  Bottom Layer w0.3: J1.7 13.643,38.989 v1(47.879,38.989)
S2: J1.8 R203.2 | length 39.7
  Top Layer w0.2: v1(48.006,36.576) 48.651,36.576 R203.2
  Bottom Layer w0.2: J1.8 12.159,37.973
  Bottom Layer w0.3: 12.159,37.973 46.609,37.973 v1(48.006,36.576)
S3: J1.9 R205.2 | length 40.6
  Top Layer w0.2: v1(47.625,32.766) 47.682,32.823 47.998,32.823 49.075,33.9 R205.2
  Bottom Layer w0.3: J1.9 43.514,36.877 v1(47.625,32.766)
S4: J1.10 R207.2 | length 41.3
  Top Layer w0.2: v1(47.625,30.226) 47.706,30.226 47.905,30.425 48.6,30.425 49.075,30.9 R207.2
  Bottom Layer w0.3: J1.10 11.811,35.433 42.418,35.433 v1(47.625,30.226)
S5: J1.11 R209.2 | length 42.3
  Top Layer w0.2: v1(47.752,27.432) 48.6,27.432 49.075,27.907 R209.2
  Bottom Layer w0.3: J1.11 13.041,34.163 41.021,34.163 v1(47.752,27.432)
S6: J1.12 R211.2 | length 42.8
  Top Layer w0.2: v1(47.879,24.765) 47.96,24.765 48.195,25 R211.2
  Bottom Layer w0.3: J1.12 13.763,32.385 40.259,32.385 v1(47.879,24.765)
S7: J2.1 R213.2 | length 45.4
  Top Layer w0.2: R213.2@41.112,9.298 R213.2
  Top Layer w0.3: J2.1 8.15,12.722 11.4,15.972 11.4,16.988 13.852,19.44 20.819,19.44 23.622,16.637 23.622,12.954 30.137,6.439 38.253,6.439 R213.2@41.112,9.298
S8: J2.2 R215.1 | length 28.1
  Top Layer w0.2: R215.1@30.666,12.732 R215.1
  Top Layer w0.3: J2.2 13.237,20.066 22.86,20.066 30.194,12.732 R215.1@30.666,12.732
S9: J2.3 R217.1 | length 44.6
  Top Layer w0.2: v1(48.26,20.574) 48.859,20.574 49.173,20.888 49.273,20.888 49.748,21.363 R217.1
  Bottom Layer w0.2: J2.3 8.693,18.022 8.776,18.022 J2.3@8.849,18.022
  Bottom Layer w0.3: J2.3 45.8,17.479 48.26,19.939 v1(48.26,20.574)
S10: J2.4 R219.1 | length 24.2
  Top Layer w0.3: J2.4 10.015,21.844 29.805,21.844 R219.1
S11: J2.5 R221.2 | length 25.2
  Top Layer w0.3: J2.5 10.055,24.384 24.384,24.384 28.956,28.956 30.444,28.956 R221.2
S12: J2.6 R223.2 | length 25.9
  Top Layer w0.3: J2.6 23.773,24.979 30.952,32.158 R223.2
VDDA: J3.1 J4.8 J101.6 J101.8 J102.1 J103.2 J104.2 | length 46.5
  Top Layer w0.5: J101.6 J101.8 69.955,20.171 ccw(c69.955,20.193) v1(69.977,20.193) ; v2(77.051,4.102) J102.1
  PWR w0.5: v2(77.051,4.102) 71.831,4.102 cw(c71.831,7.099) 68.834,7.099 68.834,19.05 cw(c69.977,19.05) v1(69.977,20.193) 71.882,20.193 ccw(c71.882,22.733) 74.422,22.733 74.422,29.083 cw(c76.962,29.083) 76.962,31.623 v1(79.121,31.623)
pads on no net: J1.MH1 J2.MH1 J3.MH1 J4.MH1 J101.3 J101.5 J101.12 J101.14 J101.16 J101.18 J101.19 J101.20 J101.21 J101.22 J101.23 J101.24 J101.25 J101.26 J101.27 J101.28 J102.2 J102.3 J102.5 J102.7 J102.9 J102.11 J102.13 J102.15 J102.16 J102.17 J102.18 J102.19 J102.20 J102.21 J102.22 J102.23 J102.24 J102.25 J103.1 J103.4 J103.6 J103.8 J103.10 J103.12 J103.14 J103.15 J103.16 J103.17 J103.18 J103.20 J103.22 J103.25 J103.26 J103.27 J103.28 J104.1 J104.3 J104.5 J104.7 J104.9 J104.12 J104.14 J104.15 J104.16 J104.17 J104.18 J104.19 J104.20 J104.21 J104.22 J104.23 J104.25 J104.27

## Polygon pours and split planes (outlines as drawn)
AGND on GND "AGND_L02_P002" (solid, pour order 2): 0,5 0,50 cw(c5,50) 5,55 145,55 cw(c145,50) 150,50 150,5 cw(c145,5) 145,0 5,0 cw(c5,5)
AGND on GND "AGND_L02_P001" (solid, pour order 1): 4.064,44.323 73.279,44.45 73.279,12.7 69.215,8.636 69.088,8.763 48.26,8.763 48.26,5.715 43.942,1.778 43.307,1.778 12.446,1.778 12.446,5.588 8.128,9.906 1.905,9.906 1.905,42.418
AGND on Top Layer "AGND_L01_P004" (solid, pour order 4): 2.921,9.906 3.302,9.525 12.573,9.525 12.573,3.048 14.478,1.143 47.244,1.143 47.244,3.937 52.959,9.652 70.612,9.652 70.612,43.688 69.215,45.085 0.127,45.085 0.127,11.049 1.27,9.906
VDDA on Top Layer "VDDA_L01_P003" (solid, pour order 3): 75.565,4.445 ccw(c78.105,4.445) 78.105,1.905 113.919,1.905 ccw(c113.919,3.683) 115.697,3.683 115.697,14.605 cw(c118.237,14.605) 118.237,17.145 147.066,17.145 ccw(c147.066,18.161) 148.082,18.161 148.082,42.926 ccw(c145.542,42.926) 145.542,45.466 76.2,45.466 ccw(c76.2,44.831) 75.565,44.831 75.565,43.561

## Silkscreen, mask and mechanical layers (free items; w line width, h text height)
Top Overlay:
  drawing of 52 lines, arcs and shapes, not listed
  text "Expansion Connector" at 128.781,41.097 h3
  text "S1 conn" at 14.732,29.594 h3 r90
  text "Shield Area" at 81.155,29.337 h2.5
  text "COMs Connector" at 129.159,27.051 h3
  text "S2 conn" at 14.986,20.577 h3 r90
  text "ETRX_Front_ECU" at 122.558,12.442 h3
  text "Bernat Costa Cesari 2023" at 122.558,10.287 h3
Mechanical 1:
  the board outline again, w0.1

## Text inside footprints (layer, text, board x,y; h text height)
J101: Top Overlay "2" at 68.306,14.896 h2 r90; Top Overlay "1" at 73.306,15.296 h2 r90; Top Overlay "27" at 73.306,33.636 h2 r90; Top Overlay "28" at 68.306,33.636 h2 r90
J102: Top Overlay "2" at 75.586,9.616 h2; Top Overlay "1" at 75.986,4.616 h2; Top Overlay "27" at 94.326,4.616 h2; Top Overlay "28" at 94.326,9.616 h2
J103: Top Overlay "2" at 102.306,34.336 h2 r270; Top Overlay "1" at 97.306,33.936 h2 r270; Top Overlay "27" at 97.306,15.596 h2 r270; Top Overlay "28" at 102.306,15.596 h2 r270
J104: Top Overlay "2" at 75.586,41.616 h2; Top Overlay "1" at 75.986,36.616 h2; Top Overlay "27" at 94.326,36.616 h2; Top Overlay "28" at 94.326,41.616 h2